# EAGLE board PCB_2D (EAGLE 9.7.0)
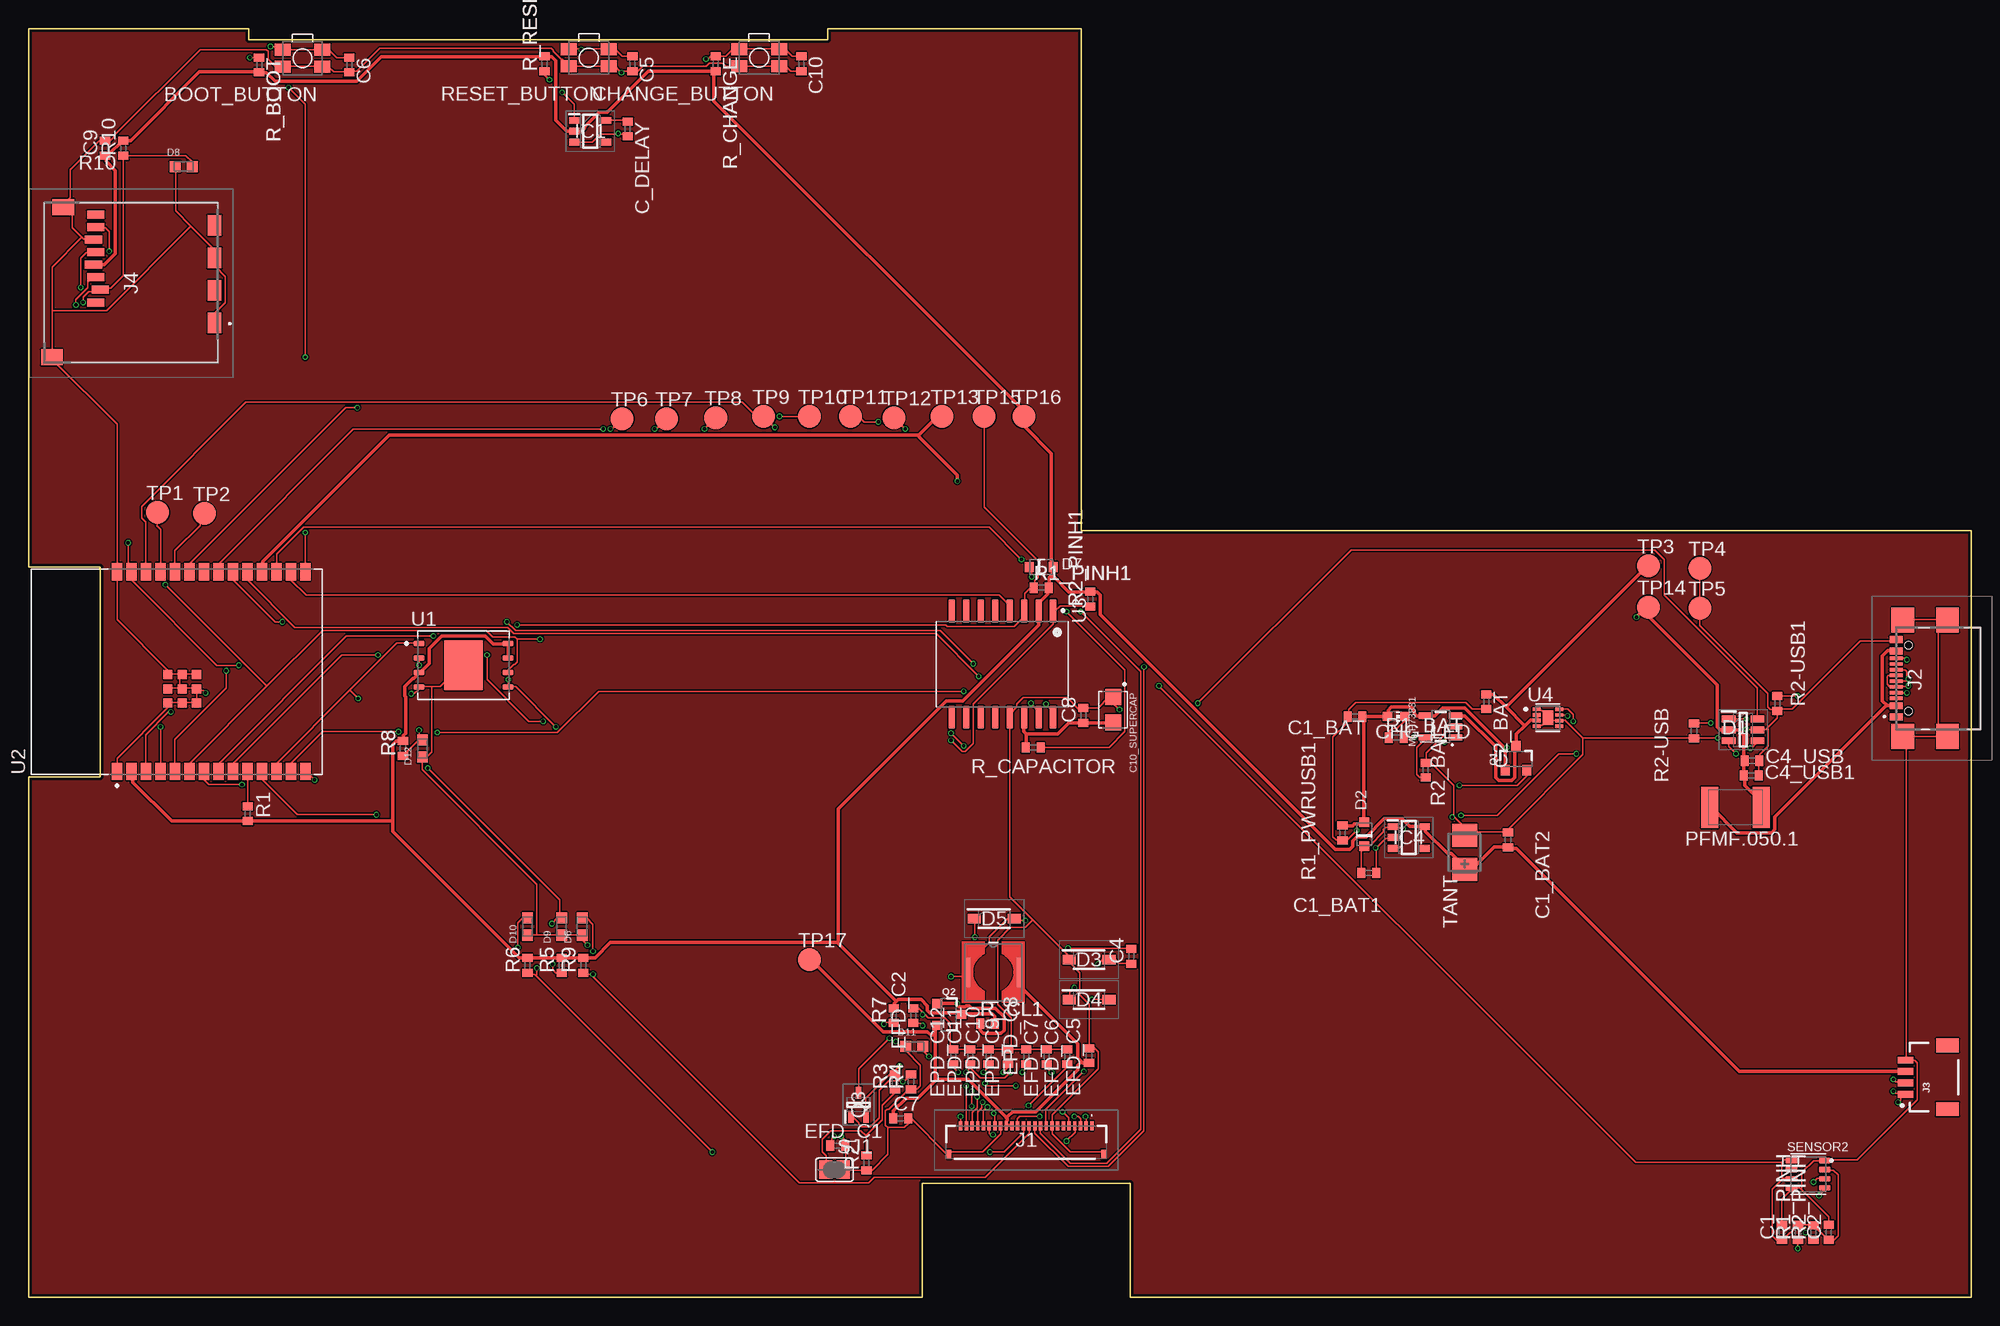
[diagram p0: board, top side]
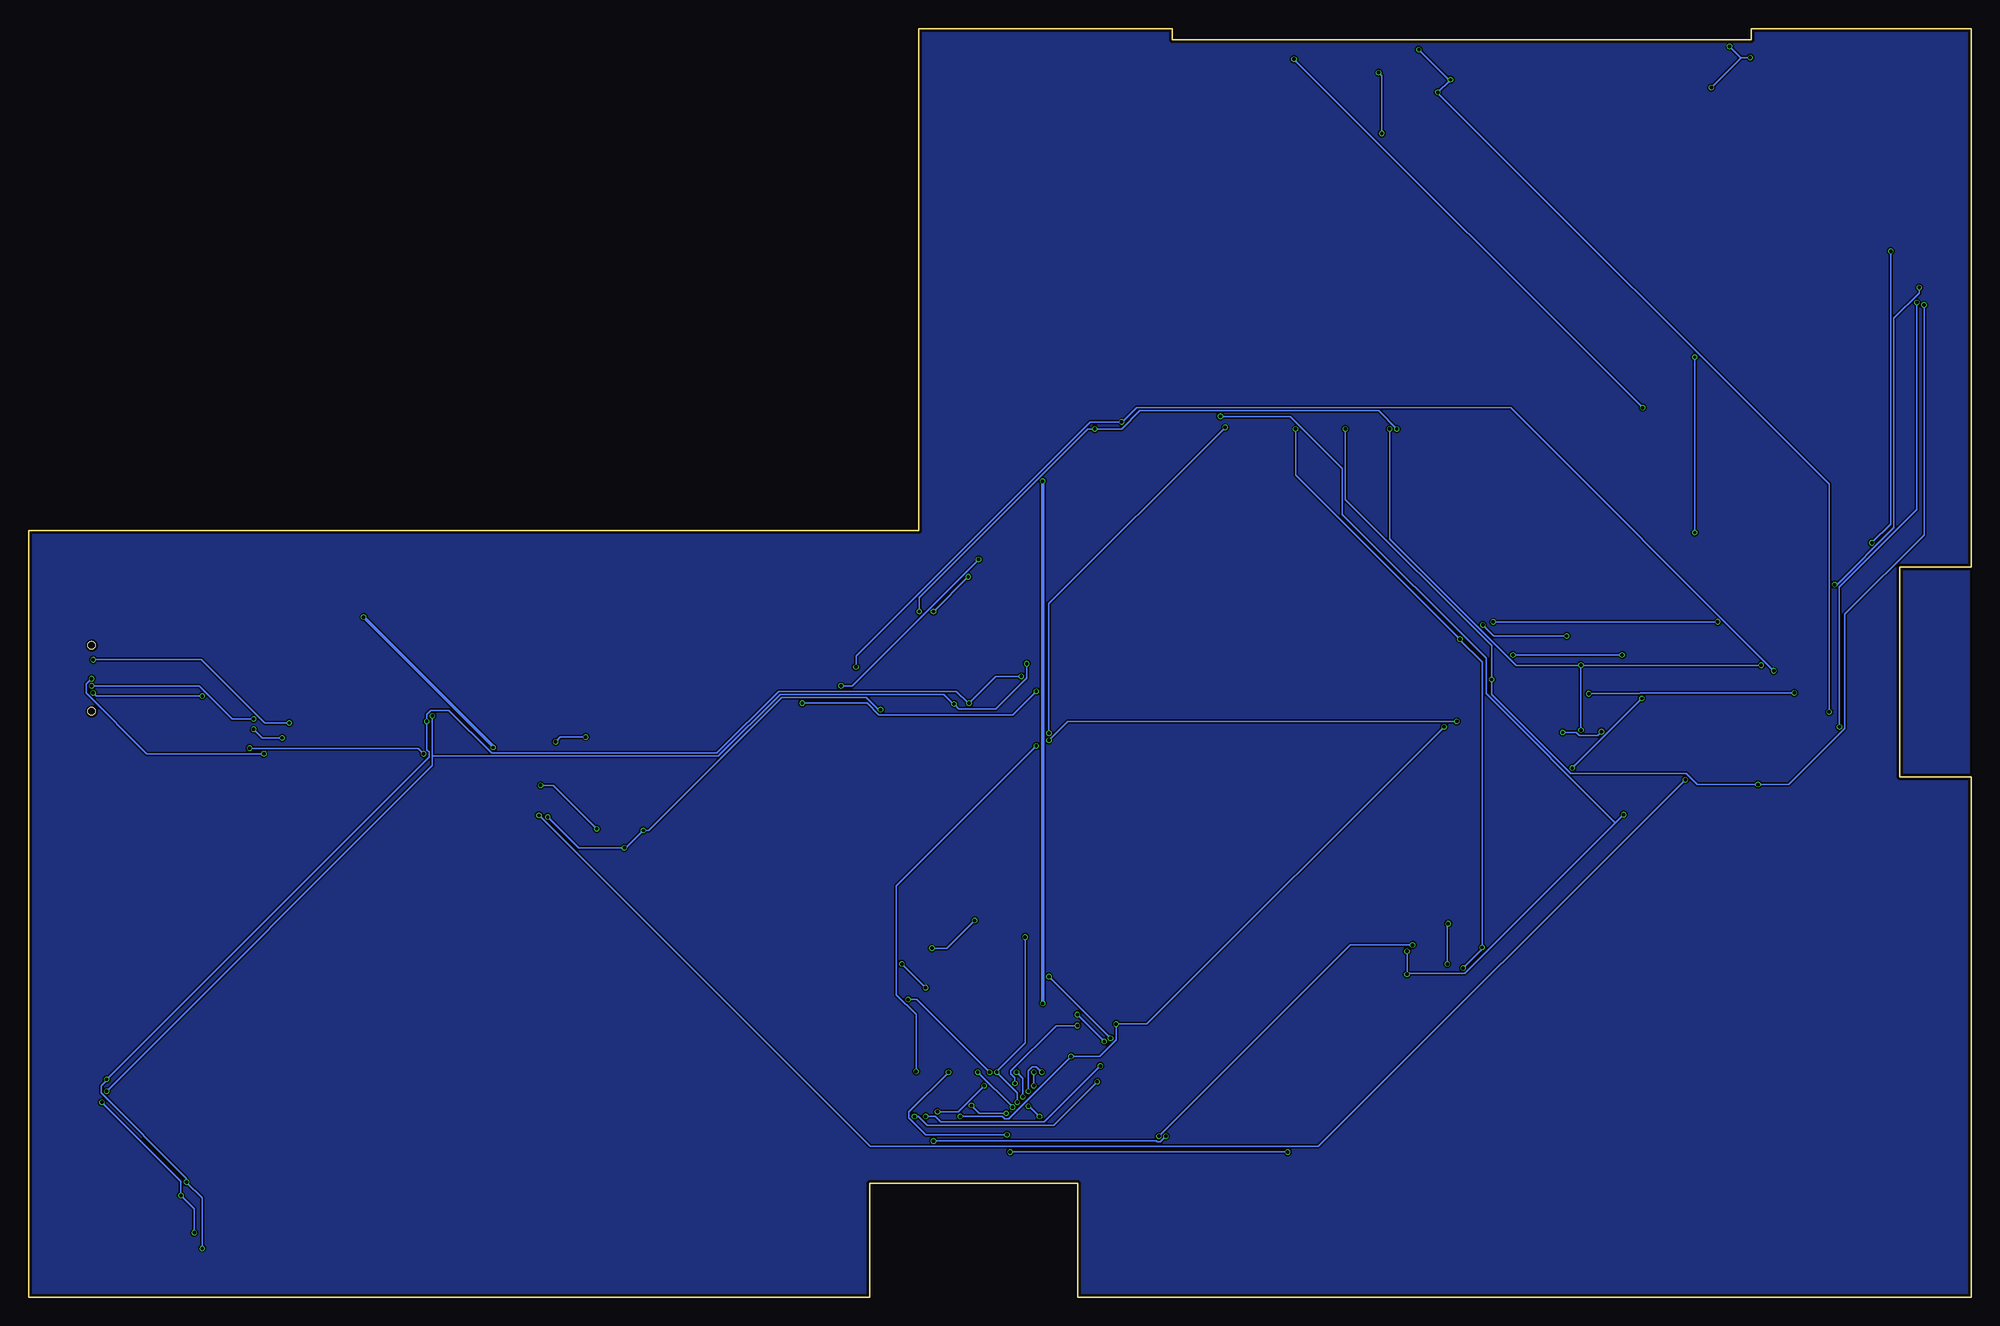
[diagram p1: board, bottom side, seen from below]

Size 170.2 x 111.2 mm. Coordinates in mm from the lower left corner, seen from the top.
Outline: 0,0 78.3,0 78.3,10 96.5,10 96.5,0 170.2,0 170.2,67.2 92.2,67.2 92.2,111.2 70,111.2 70,110.2 19.3,110.2 19.3,111.2 0,111.2 0,64 6.3,64 6.3,45.6 0,45.6 0,0
Copper layers (1*16): Top 0.035mm / dielectric 1.6mm / Bottom 0.035mm
Design rules "jlcpcb-2layers.dru": minimum track width 0.15mm, minimum drill 0.3mm, track to track 5mil, track to pad 5mil, pad to pad 5mil, via to via 5mil, smd to smd 5mil, copper to edge 0.2mm, drill to drill 6mil, minimum pad ring 10mil, minimum via ring 3mil, stop-mask expansion 4mil, vias tented up to drill 0mil, thermal gap 10mil
Net classes: 0 default: width 0.15 mm; 1 POWER: width 0.3 mm

## Footprints (pad centres in the part's own frame; a part is rotated, then mirrored left to right if it is on the bottom)
MYBUTTON = smd 1.4 x 1.05: 1 1.75,0.75; 2 -1.75,0.75; 3 -1.75,-0.75; 4 1.75,-0.75
EAGLE-LTSPICE_C0402 = smd 0.7 x 0.9: 1 -0.65,0; 2 0.65,0
CAPCP3225X100N = smd 1.4 x 1.4: 1 -1.1,0; 2 1.1,0
ADAFRUIT_CHIP-LED0603 = smd 0.8 x 0.8: A 0,-0.75; C 0,0.75
SOT95P280X145-6N = smd 1.2 x 0.6: 1 -1.25,0.95; 2 -1.25,0; 3 -1.25,-0.95; 4 1.25,-0.95; 5 1.25,0; 6 1.25,0.95
ESP32_WROVER_AVX---SD0805S020S1R0_AVX_SD0805S020S1R0_0 = smd 0.8 x 0.9: 1 -1.05,0; 2 1.05,0
SOD3716X135N = smd 1.15 x 0.8: 1 -1.75,0; 2 1.75,0
DIOC1608X36N = smd 0.97 x 0.94: 1 -0.75,0; 2 0.75,0
SOT95P280X125-5N = smd 0.9 x 0.6: 1 -1.4,0.95; 2 -1.4,0; 3 -1.4,-0.95; 4 1.4,-0.95; 5 1.4,0.95
SOT95P280X120-5N = smd 0.9 x 0.6: 1 -1.4,0.95; 2 -1.4,0; 3 -1.4,-0.95; 4 1.4,-0.95; 5 1.4,0.95
FH34SRJ24S05SH99 = smd 0.3 x 0.8: 1 5.75,1.45; 2 5.25,1.45; 3 4.75,1.45; 4 4.25,1.45; 5 3.75,1.45; 6 3.25,1.45; 7 2.75,1.45; 8 2.25,1.45; 9 1.75,1.45; 10 1.25,1.45; 11 0.75,1.45; 12 0.25,1.45; 13 -0.25,1.45; 14 -0.75,1.45; 15 -1.25,1.45; 16 -1.75,1.45; 17 -2.25,1.45; 18 -2.75,1.45; 19 -3.25,1.45; 20 -3.75,1.45; 21 -4.25,1.45; 22 -4.75,1.45; 23 -5.25,1.45; 24 -5.75,1.45 | smd 0.4 x 0.8: MP1 6.75,-1.05; MP2 -6.75,-1.05
SAMACSYS_PARTS_USB4110GFA = smd 0.3 x 1.15: A1 -3.553,3.678; A4 -2.55,3.678; A5 -1.25,3.678; A6 -0.25,3.678; A7 0.25,3.678; A8 1.25,3.678; A9 2.55,3.678; A12 3.553,3.678; B1 3.253,3.678; B4 2.25,3.678; B5 1.75,3.678; B6 0.75,3.678; B7 -0.75,3.678; B8 -1.75,3.678; B9 -2.25,3.678; B12 -3.253,3.678 | smd 2.18 x 2: MP1 -5.11,-0.827; MP2 5.11,-0.827; MP3 -5.11,3.103; MP4 5.11,3.103 | hole 0.65: -2.89,2.603; 2.89,2.603
JST04_1MM_RA = smd 0.6 x 1.35: 1 -1.5,0; 2 -0.5,0; 3 0.5,0; 4 1.5,0 | smd 1.2 x 2: NC1 2.8,-3.675; NC2 -2.8,-3.675
112ATAARR03ATTEND = smd 1.8 x 1.2: G1 10.6,10.4; G2 4.9,10.4; S1 7.75,10.4; S2 2.05,10.4 | smd 1.4 x 1.9: G3 13.6,-3.85; G4 0.45,-2.85 | smd 0.7 x 1.5: P1 8.8,0; P2 7.7,0.4; P3 6.6,0; P4 5.5,-0.2; P5 4.4,0; P6 3.3,-0.2; P7 2.2,0; P8 1.1,0
IND_4828-WE-TPC_WRE = smd 0.508 x 2.54: 1 -2.286,0; 2 2.286,0
ESP32_WROVER_SPARKFUN-IC-POWER_SOT23-5 = smd 0.55 x 1.2: 1 -0.95,-1.3; 2 0,-1.3; 3 0.95,-1.3; 4 0.95,1.3; 5 -0.95,1.3
ESP32C6_VARISTOR_CT/CN1812 = smd 1.5 x 3.6: 1 -2.25,0; 2 2.25,0
ESP32_WROVER_SPARKFUN-DISCRETESEMI_SOT23-3 = smd 0.8 x 0.9: 1 -0.95,-1; 2 0.95,-1; 3 0,1.1
SOT65P210X110-3N = smd 1.05 x 0.5: 1 -1.05,0.65; 2 -1.05,-0.65; 3 1.05,0
ESP32_WROVER_EAGLE-LTSPICE_R0402 = smd 0.7 x 0.9: 1 -0.65,0; 2 0.65,0
ESP32_WROVER_BME680_PSON80P300X300X100-8N = smd 1.016 x 0.5: 1 1.458,1.2; 2 1.458,0.4; 3 1.458,-0.4; 4 1.458,-1.2; 5 -1.458,-1.22; 6 -1.458,-0.4; 7 -1.458,0.4; 8 -1.458,1.2
SJ = smd 1.168 x 1.6: 1 -0.762,0; 2 0.762,0
RCL_CT3528 = smd 2 x 2.2: + -1.5,0; - 1.5,0
TP20R = smd 2 x 2: TP 0,0
SON127P600X800X80-9N = smd 0.94 x 0.44: 1 -3.895,1.905; 2 -3.895,0.635; 3 -3.895,-0.635; 4 -3.895,-1.905; 5 3.895,-1.905; 6 3.895,-0.635; 7 3.895,0.635; 8 3.895,1.905 | smd 3.4 x 4.3: 9 0,0
XCVR_ESP32-C6-WROOM-1-N8 = smd 1.5 x 0.9: 1 -8.75,5.26; 2 -8.75,3.99; 3 -8.75,2.72; 4 -8.75,1.45; 5 -8.75,0.18; 6 -8.75,-1.09; 7 -8.75,-2.36; 8 -8.75,-3.63; 9 -8.75,-4.9; 10 -8.75,-6.17; 11 -8.75,-7.44; 12 -8.75,-8.71; 13 -8.75,-9.98; 14 -8.75,-11.25; 15 8.75,-11.25; 16 8.75,-9.98; 17 8.75,-8.71; 18 8.75,-7.44; 19 8.75,-6.17; 20 8.75,-4.9; 21 8.75,-3.63; 22 8.75,-2.36; 23 8.75,-1.09; 24 8.75,0.18; 25 8.75,1.45; 26 8.75,2.72; 27 8.75,3.99; 28 8.75,5.26 | smd 0.8 x 0.8: 29_1 -2.755,0.79; 29_2 -1.505,0.79; 29_3 -0.255,0.79; 29_4 -2.755,-0.46; 29_5 -1.505,-0.46; 29_6 -0.255,-0.46; 29_7 -2.755,-1.71; 29_8 -1.505,-1.71; 29_9 -0.255,-1.71
SOIC127P1032X265-16N = smd 2.05 x 0.59: 1 -4.655,4.445; 2 -4.655,3.175; 3 -4.655,1.905; 4 -4.655,0.635; 5 -4.655,-0.635; 6 -4.655,-1.905; 7 -4.655,-3.175; 8 -4.655,-4.445; 9 4.655,-4.445; 10 4.655,-3.175; 11 4.655,-1.905; 12 4.655,-0.635; 13 4.655,0.635; 14 4.655,1.905; 15 4.655,3.175; 16 4.655,4.445
SON50P200X200X80-9N = smd 0.76 x 0.27: 1 -0.985,0.75; 4 -0.985,-0.75; 5 0.985,-0.75; 6 0.985,-0.25; 7 0.985,0.25; 8 0.985,0.75 | smd 0.76 x 0.372: 2 -0.985,0.25; 3 -0.985,-0.25 | smd 0.9 x 1.3: 9 0,0

## Placement (x,y rotation side)
BOOT_BUTTON  BUTTON_CUSYOMV1  [MYBUTTON]  24,108.6 180 top
C1  100nF  [EAGLE-LTSPICE_C0402]  153.6,5.7 90 top
C1_BAT  4.7uF  [EAGLE-LTSPICE_C0402]  116.2,50.9 180 top
C1_BAT1  4.7uF  [EAGLE-LTSPICE_C0402]  117.4,37.2 0 top
C1_BAT2  4.7uF  [EAGLE-LTSPICE_C0402]  129.6,40.1 90 top
C2  100nF  [EAGLE-LTSPICE_C0402]  157.7,5.7 90 top
C2_BAT  4.7uF  [EAGLE-LTSPICE_C0402]  127.7,52.2 270 top
C4  4.7uF/25V  [EAGLE-LTSPICE_C0402]  96.6,29.9 90 top
C4_USB  4.7uF  [EAGLE-LTSPICE_C0402]  150.98,47.04 0 top
C4_USB1  100nF  [EAGLE-LTSPICE_C0402]  150.91,45.75 0 top
C5  1uF  [EAGLE-LTSPICE_C0402]  52.9,108.11 270 top
C6  100nF  [EAGLE-LTSPICE_C0402]  28.1,108.01 270 top
C7  10uF  [EAGLE-LTSPICE_C0402]  76.4,15.7 0 top
C8  100nF  [EAGLE-LTSPICE_C0402]  92.4,51 90 top
C9  100nF  [EAGLE-LTSPICE_C0402]  6.7,100.72 90 top
C10  100nF  [EAGLE-LTSPICE_C0402]  67.7,108.11 270 top
C10_SUPERCAP  CPH3225A  [CAPCP3225X100N]  95,51.5 270 top
C_DELAY  100nF  [EAGLE-LTSPICE_C0402]  52.5,102.4 270 top
CHANGE_BUTTON  BUTTON_CUSYOMV1  [MYBUTTON]  64,108.65 180 top
CHG_LED  [ADAFRUIT_CHIP-LED0603]  119.8,50.9 270 top
D1  USBLC6-2SC6Y  [SOT95P280X145-6N]  150.19,49.74 0 top
D2  ESP32_WROVER_AVX---SD0805S020S1R0_AVX_SD0805S020S1R0_0_0AVX_SD0805S020S1R0_0_0  [ESP32_WROVER_AVX---SD0805S020S1R0_AVX_SD0805S020S1R0_0]  117,40.6 90 top
D3  MBR0530  [SOD3716X135N]  92.9,29.6 0 top
D4  MBR0530  [SOD3716X135N]  92.9,26.1 0 top
D5  MBR0530  [SOD3716X135N]  84.6,33.2 0 top
D6  PGB1010603MR  [DIOC1608X36N]  48.5,32.5 90 top
D7  ESP32_WROVER_AVX---SD0805S020S1R0_AVX_SD0805S020S1R0_0_0AVX_SD0805S020S1R0_0_0  [ESP32_WROVER_AVX---SD0805S020S1R0_AVX_SD0805S020S1R0_0]  88.7,64 0 top
D8  PGB1010603MR  [DIOC1608X36N]  13.6,99.1 0 top
D9  PGB1010603MR  [DIOC1608X36N]  46.7,32.5 90 top
D10  PGB1010603MR  [DIOC1608X36N]  43.7,32.5 90 top
D11  PGB1010603MR  [DIOC1608X36N]  77.6,22 0 top
D12  PGB1010603MR  [DIOC1608X36N]  34.5,48.1 90 top
EFD_C1  1uF/50V  [EAGLE-LTSPICE_C0402]  70.9,13.3 0 top
EFD_C2  1uF/50V  [EAGLE-LTSPICE_C0402]  77.5,24.7 90 top
EFD_C5  1uF/50V  [EAGLE-LTSPICE_C0402]  92.9,21.2 90 top
EFD_C6  1uF/50V  [EAGLE-LTSPICE_C0402]  91,21.1 90 top
EFD_C7  1uF/50V  [EAGLE-LTSPICE_C0402]  89.2,21.1 90 top
EPD_C8  1uF/50V  [EAGLE-LTSPICE_C0402]  87.4,21.1 90 top
EPD_C9  1uF/50V  [EAGLE-LTSPICE_C0402]  85.8,21.1 90 top
EPD_C10  1uF/50V  [EAGLE-LTSPICE_C0402]  84.1,21.1 90 top
EPD_C11  1uF/50V  [EAGLE-LTSPICE_C0402]  82.5,21.1 90 top
EPD_C12  1uF/50V  [EAGLE-LTSPICE_C0402]  81,21.1 90 top
IC1  BD5229G-TR  [SOT95P280X125-5N]  49.2,102.2 0 top
IC4  XC6220A331MR-G  [SOT95P280X120-5N]  120.9,40.3 0 top
J1  FH34SRJ-24S-0.5SH_99_  [FH34SRJ24S05SH99]  87.4,13.6 0 top
J2  SAMACSYS_PARTS_USB4110-GF-A  [SAMACSYS_PARTS_USB4110GFA]  167.28,54.26 90 top
J3  QWIIC_RIGHT_ANGLE  [JST04_1MM_RA]  164.43,19.3 90 top
J4  112A-TAAR-R03_ATTEND  [112ATAARR03ATTEND]  5.89,96 270 top
L1  744043680IND_4828-WE-TPC_WRE  [IND_4828-WE-TPC_WRE]  84.51,28.5 0 top
MCP73831  ESP32_WROVER_SPARKFUN-IC-POWER_MCP73831  [ESP32_WROVER_SPARKFUN-IC-POWER_SOT23-5]  123.7,50.03 90 top
PFMF.050.1  ESP32C6_VARISTORCN1812  [ESP32C6_VARISTOR_CT/CN1812]  149.52,42.96 0 top
Q1  20V/4.2A/52mΩ/1.4W  [ESP32_WROVER_SPARKFUN-DISCRETESEMI_SOT23-3]  130.3,47.2 0 top
Q2  20V/4.2A/52mΩ/1.4W  [ESP32_WROVER_SPARKFUN-DISCRETESEMI_SOT23-3]  80.6,24.8 270 top
Q3  SI1308EDL-T1-GE3  [SOT65P210X110-3N]  72.7,16.9 90 top
R1  10K  [ESP32_WROVER_EAGLE-LTSPICE_R0402]  19.2,42.4 270 top
R1_BAT  200  [ESP32_WROVER_EAGLE-LTSPICE_R0402]  119.82,49.06 0 top
R1_PINH  10K  [ESP32_WROVER_EAGLE-LTSPICE_R0402]  155,5.7 90 top
R1_PINH1  10K  [ESP32_WROVER_EAGLE-LTSPICE_R0402]  88.7,62.2 0 top
R1_PWRUSB1  100K  [ESP32_WROVER_EAGLE-LTSPICE_R0402]  115.1,40.7 90 top
R2  2.2  [ESP32_WROVER_EAGLE-LTSPICE_R0402]  73.4,11.8 90 top
R2-USB  5k1  [ESP32_WROVER_EAGLE-LTSPICE_R0402]  145.89,49.64 270 top
R2-USB1  10K  [ESP32_WROVER_EAGLE-LTSPICE_R0402]  153.18,52.05 90 top
R2_BAT  2K  [ESP32_WROVER_EAGLE-LTSPICE_R0402]  122.4,46.2 270 top
R2_PINH  10K  [ESP32_WROVER_EAGLE-LTSPICE_R0402]  156.35,5.69 90 top
R2_PINH1  10K  [ESP32_WROVER_EAGLE-LTSPICE_R0402]  93,61.2 90 top
R3  0.47  [ESP32_WROVER_EAGLE-LTSPICE_R0402]  75.9,18.9 90 top
R4  10K  [ESP32_WROVER_EAGLE-LTSPICE_R0402]  77.3,18.9 90 top
R5  10K  [ESP32_WROVER_EAGLE-LTSPICE_R0402]  46.7,29.1 90 top
R6  10K  [ESP32_WROVER_EAGLE-LTSPICE_R0402]  43.7,29.1 90 top
R7  10K  [ESP32_WROVER_EAGLE-LTSPICE_R0402]  75.8,24.7 90 top
R8  10K  [ESP32_WROVER_EAGLE-LTSPICE_R0402]  32.8,48.1 90 top
R9  10K  [ESP32_WROVER_EAGLE-LTSPICE_R0402]  48.6,29.1 90 top
R10  10K  [ESP32_WROVER_EAGLE-LTSPICE_R0402]  8.3,100.7 90 top
R_BOOT  10K  [ESP32_WROVER_EAGLE-LTSPICE_R0402]  20.2,108.01 270 top
R_CAPACITOR  15  [ESP32_WROVER_EAGLE-LTSPICE_R0402]  88,48.2 180 top
R_CHANGE  10K  [ESP32_WROVER_EAGLE-LTSPICE_R0402]  60.2,108.11 270 top
R_CL1  10K  [ESP32_WROVER_EAGLE-LTSPICE_R0402]  84,24 0 top
R_RESET  10K  [ESP32_WROVER_EAGLE-LTSPICE_R0402]  45.2,108.11 90 top
RESET_BUTTON  BUTTON_CUSYOMV1  [MYBUTTON]  49.08,108.65 180 top
SENSOR2  ESP32_WROVER_BME680_BME680  [ESP32_WROVER_BME680_PSON80P300X300X100-8N]  155.9,10.8 0 top
SJ1  [SJ]  70.6,11.2 180 top
TANT  100uF  [RCL_CT3528]  125.8,39 90 top
TP1  TPTP20R  [TP20R]  11.3,68.8 0 top
TP2  TPTP20R  [TP20R]  15.4,68.7 0 top
TP3  TPTP20R  [TP20R]  141.9,64.1 0 top
TP4  TPTP20R  [TP20R]  146.4,63.9 0 top
TP5  TPTP20R  [TP20R]  146.4,60.4 0 top
TP6  TPTP20R  [TP20R]  52,77 0 top
TP7  TPTP20R  [TP20R]  55.9,77 0 top
TP8  TPTP20R  [TP20R]  60.2,77.1 0 top
TP9  TPTP20R  [TP20R]  64.4,77.2 0 top
TP10  TPTP20R  [TP20R]  68.4,77.2 0 top
TP11  TPTP20R  [TP20R]  72,77.2 0 top
TP12  TPTP20R  [TP20R]  75.8,77.1 0 top
TP13  TPTP20R  [TP20R]  80,77.2 0 top
TP14  TPTP20R  [TP20R]  141.9,60.5 0 top
TP15  TPTP20R  [TP20R]  83.7,77.2 0 top
TP16  TPTP20R  [TP20R]  87.2,77.2 0 top
TP17  TPTP20R  [TP20R]  68.4,29.6 0 top
U1  W25Q512JVEIQ  [SON127P600X800X80-9N]  38.1,55.4 0 top
U2  ESP32-C6-WROOM-1-N8  [XCVR_ESP32-C6-WROOM-1-N8]  13,54.84 90 top
U3  DS3231SN#  [SOIC127P1032X265-16N]  85.3,55.5 270 top
U4  MAX17048G+T10  [SON50P200X200X80-9N]  133.1,50.8 0 top

## Library data of the parts
BOOT_BUTTON CHANGE_BUTTON CHG_LED PFMF.050.1 RESET_BUTTON SJ1 TP1-TP17 = DeskAssistant v19 v1
C1 C1_BAT C1_BAT1 C1_BAT2 C2 C2_BAT C4 C4_USB C4_USB1 C5-C10 C_DELAY EFD_C1 EFD_C2 EFD_C5-EFD_C7 EPD_C8-EPD_C12 = DeskAssistant v19 v1; SPICEMODEL: NONE; SPICEPREFIX: C
C10_SUPERCAP = DeskAssistant v19 v1; AVAILABILITY: Not in stock; CHECK_PRICES: https://www.snapeda.com/parts/CPH3225A/Seiko+Instruments/view-part/?ref=eda; DESCRIPTION: 11 mF (EDLC) Supercapacitor 3.3 V 1210 (3225 Metric) - -; MF: Seiko Instruments; MP: CPH3225A; PACKAGE: 1210 Seiko; PRICE: None; PURCHASE-URL: https://www.snapeda.com/api/url_track_click_mouser/?unipart_id=562593&manufacturer=Seiko Instruments&part_name=CPH3225A&search_term=None; SNAPEDA_LINK: https://www.snapeda.com/parts/CPH3225A/Seiko+Instruments/view-part/?ref=snap
D1 = DeskAssistant v19 v1; AVAILABILITY: In Stock; CHECK_PRICES: https://www.snapeda.com/parts/USBLC6-2SC6Y/STMicroelectronics/view-part/?ref=eda; DESCRIPTION: 17V Clamp 5A (8/20µs) Ipp Tvs Diode Surface Mount SOT-23-6; MF: STMicroelectronics; MP: USBLC6-2SC6Y; PACKAGE: SOT-23-6 STMicroelectronics; PRICE: None; SNAPEDA_LINK: https://www.snapeda.com/parts/USBLC6-2SC6Y/STMicroelectronics/view-part/?ref=snap
D2 D7 = DeskAssistant v19 v1; CENTROID_NOT_SPECIFIED: No; DATASHEET: http://datasheets.avx.com/schottky.pdf; DIGIKEY_DESCRIPTION: DIODE SCHOTTKY 20V 1A 0805; DIGIKEY_PART_NUMBER: 478-7800-1-ND; LEAD_FREE: yes; MF: AVX; MOUSER_PART_NUMBER: 581-SD0805S020S1R0; PACKAGE: 0805 (2012 metric); PREFIX: D; ROHS: yes; TEMPERATURE_RANGE_HIGH: +125°C; TEMPERATURE_RANGE_LOW: -55°C
D3-D5 = DeskAssistant v19 v1; AVAILABILITY: In Stock; CHECK_PRICES: https://www.snapeda.com/parts/MBR0530/Onsemi/view-part/?ref=eda; DESCRIPTION: Diode Schottky 30 V 500mA Surface Mount SOD-123; MF: ON Semiconductor; MP: MBR0530; PACKAGE: SOD-123-2 ON Semiconductor; PRICE: None; PURCHASE-URL: https://www.snapeda.com/api/url_track_click_mouser/?unipart_id=179458&manufacturer=ON Semiconductor&part_name=MBR0530&search_term=None; SNAPEDA_LINK: https://www.snapeda.com/parts/MBR0530/Onsemi/view-part/?ref=snap
D6 D8-D12 = DeskAssistant v19 v1; AVAILABILITY: In Stock; CHECK_PRICES: https://www.snapeda.com/parts/PGB1010603MR/Littelfuse/view-part/?ref=eda; DESCRIPTION: 150V (Typ) Clamp - Ipp Tvs Diode Surface Mount 0603 (1608 Metric); MF: Littelfuse Inc.; MP: PGB1010603MR; PACKAGE: 0603 Littelfuse Inc.; PRICE: None; PURCHASE-URL: https://www.snapeda.com/api/url_track_click_mouser/?unipart_id=5659453&manufacturer=Littelfuse Inc.&part_name=PGB1010603MR&search_term=None; SNAPEDA_LINK: https://www.snapeda.com/parts/PGB1010603MR/Littelfuse/view-part/?ref=snap
IC1 = DeskAssistant v19 v1; DESCRIPTION: Voltage Detector with Adjustable Delay Time: CMOS processes are utilized to develop high precision, low current consumption CMOS reset ICs that allow arbitrary setting of the delay time. The extensive lineup includes both Nch Open Drain and CMOS output types in a wide range of detection voltages (from 2.3V to 6.0V, in 0.1V steps), enabling selection of the ideal solution based on customer requirements. In addition, the entire series is of course both lead-free and RoHS-compliant.; HEIGHT: 1.25mm; MANUFACTURER_NAME: ROHM Semiconductor; MANUFACTURER_PART_NUMBER: BD5229G-TR; MOUSER_PART_NUMBER: 755-BD5229G-TR; MOUSER_PRICE-STOCK: https://www.mouser.co.uk/ProductDetail/ROHM-Semiconductor/BD5229G-TR?qs=4kLU8WoGk0vvnhrrYwdszw%3D%3D
IC4 = DeskAssistant v19 v1; DESCRIPTION: LDO Voltage Regulators; HEIGHT: 1.2mm; MANUFACTURER_NAME: Torex; MANUFACTURER_PART_NUMBER: XC6220A331MR-G; MOUSER_PART_NUMBER: 865-XC6220A331MR-G; MOUSER_PRICE-STOCK: https://www.mouser.co.uk/ProductDetail/Torex-Semiconductor/XC6220A331MR-G?qs=AsjdqWjXhJ8ZSWznL1J0gg%3D%3D
J1 = DeskAssistant v19 v1; DESCRIPTION: 24 Position FFC, FPC Connector Contacts, Top and Bottom 0.020" (0.50mm) Surface Mount, Right Angle; HEIGHT: 1.1mm; MANUFACTURER_NAME: Hirose; MANUFACTURER_PART_NUMBER: FH34SRJ-24S-0.5SH(99); MOUSER_PART_NUMBER: 798-FH34SRJ24S05SH99; MOUSER_PRICE-STOCK: https://www.mouser.co.uk/ProductDetail/Hirose-Connector/FH34SRJ-24S-0.5SH99?qs=vcbW%252B4%252BSTIpKBl5ap9J8Fw%3D%3D
J2 = DeskAssistant v19 v1; DESCRIPTION: CONN USB 2.0 TYPE-C R/A SMT; HEIGHT: 3.26mm; MANUFACTURER_NAME: GCT (GLOBAL CONNECTOR TECHNOLOGY); MANUFACTURER_PART_NUMBER: USB4110-GF-A; MOUSER_PART_NUMBER: 640-USB4110-GF-A; MOUSER_PRICE-STOCK: https://www.mouser.co.uk/ProductDetail/GCT/USB4110-GF-A?qs=KUoIvG%2F9IlYiZvIXQjyJeA%3D%3D
J3 = DeskAssistant v19 v1; PROD_ID: CONN-13694
J4 = DeskAssistant v19 v1; DESCRIPTION: Micro SD Card Socket, Push-Push Type, Top Mount, SMT, H=1.83mm, 10u; HEIGHT: 1.9mm; MANUFACTURER_NAME: ATTEND; MANUFACTURER_PART_NUMBER: 112A-TAAR-R03 ATTEND
L1 = DeskAssistant v19 v1; COPYRIGHT: Copyright (C) 2024 Ultra Librarian. All rights reserved.; MANUFACTURER_PART_NUMBER: 744043680; MFR_NAME: Wurth Electronics
MCP73831 = DeskAssistant v19 v1; PROD_ID: IC-09995
Q1 Q2 = DeskAssistant v19 v1; PROD_ID: TRAN-14388
Q3 = DeskAssistant v19 v1; AVAILABILITY: In Stock; CHECK_PRICES: https://www.snapeda.com/parts/SI1308EDL-T1-GE3/Vishay+Siliconix/view-part/?ref=eda; DESCRIPTION: Si1308EDL-T1-GE3 N-channel MOSFET Transistor, 1.5 A, 30 V, 3-Pin SC-70 | Siliconix / Vishay SI1308EDL-T1-GE3; MF: Vishay Siliconix; MP: SI1308EDL-T1-GE3; PACKAGE: SOT-323 Vishay Semiconductor; PRICE: None; PURCHASE-URL: https://www.snapeda.com/api/url_track_click_mouser/?unipart_id=274603&manufacturer=Vishay Siliconix&part_name=SI1308EDL-T1-GE3&search_term=None; SNAPEDA_LINK: https://www.snapeda.com/parts/SI1308EDL-T1-GE3/Vishay+Siliconix/view-part/?ref=snap
R1 R1_BAT R1_PINH R1_PINH1 R1_PWRUSB1 R2 R2-USB R2-USB1 R2_BAT R2_PINH R2_PINH1 R3-R10 R_BOOT R_CAPACITOR R_CHANGE R_CL1 R_RESET = DeskAssistant v19 v1; SPICEMODEL: NONE; SPICEPREFIX: R
SENSOR2 = DeskAssistant v19 v1; AVAILABILITY: Unavailable; DESCRIPTION: Integrated Environmental Unit; MF: Bosch Sensortec; MP: BME680; PACKAGE: LGA-8 Bosch Tools; PRICE: None
TANT = DeskAssistant v19 v1; SPICEPREFIX: C
U1 = DeskAssistant v19 v1; AVAILABILITY: In Stock; CHECK_PRICES: https://www.snapeda.com/parts/W25Q512JVEIQ/Winbond+Electronics/view-part/?ref=eda; DESCRIPTION: FLASH - NOR Memory IC 512Mb (64M x 8) SPI - Quad I/O 133 MHz 8-WSON (8x6); MF: Winbond Electronics; MP: W25Q512JVEIQ; PACKAGE: Package; PRICE: None; SNAPEDA_LINK: https://www.snapeda.com/parts/W25Q512JVEIQ/Winbond+Electronics/view-part/?ref=snap
U2 = DeskAssistant v19 v1; AVAILABILITY: In Stock; CHECK_PRICES: https://www.snapeda.com/parts/ESP32-C6-WROOM-1-N8/Espressif+Systems/view-part/?ref=eda; DESCRIPTION: Multiprotocol Modules ESP32-C6 module, Wi-Fi 6 in 2.4 GHz band, Bluetooth 5, Zigbee 3.0 and Thread. ESP34-WROOM Compatible - ENGINEERING SAMPLE; MF: Espressif Systems; MP: ESP32-C6-WROOM-1-N8; PACKAGE: None; PRICE: None; SNAPEDA_LINK: https://www.snapeda.com/parts/ESP32-C6-WROOM-1-N8/Espressif+Systems/view-part/?ref=snap
U3 = DeskAssistant v19 v1; AVAILABILITY: In Stock; CHECK_PRICES: https://www.snapeda.com/parts/DS3231SN%23/Analog+Devices/view-part/?ref=eda; DESCRIPTION: Extremely Accurate I²C-Integrated RTC/TCXO/Crystal; MF: Analog Devices; MP: DS3231SN#; PACKAGE: SOIC-16 Maxim; PRICE: None; PURCHASE-URL: https://www.snapeda.com/api/url_track_click_mouser/?unipart_id=99048&manufacturer=Analog Devices&part_name=DS3231SN#&search_term=None; SNAPEDA_LINK: https://www.snapeda.com/parts/DS3231SN%23/Analog+Devices/view-part/?ref=snap
U4 = DeskAssistant v19 v1; AVAILABILITY: In Stock; CHECK_PRICES: https://www.snapeda.com/parts/MAX17048G+T10/Analog+Devices/view-part/?ref=eda; DESCRIPTION: 3µA 1-Cell/2-Cell Fuel Gauge with ModelGauge; MF: Analog Devices; MP: MAX17048G+T10; PACKAGE: TDFN-8 Maxim; PRICE: None; PURCHASE-URL: https://www.snapeda.com/api/url_track_click_mouser/?unipart_id=329239&manufacturer=Analog Devices&part_name=MAX17048G+T10&search_term=None; SNAPEDA_LINK: https://www.snapeda.com/parts/MAX17048G+T10/Analog+Devices/view-part/?ref=snap

## Nets
3V3 [POWER]: C1_BAT2.1 C9.1 D7.2 IC1.2 IC4.5 J3.3 J4.P4 Q2.3 R1.2 R1_PINH1.2 R2_PINH1.2 R5.2 R6.2 R7.2 R8.2 R9.2 R10.2 R_BOOT.2 R_CHANGE.2 R_CL1.2 R_RESET.2 TANT.+ TP16.TP U1.3 U1.7 U1.8 U2.2 U3.2
32KHZ: R2_PINH1.1 U2.9 U3.1
DN: D1.1 J2.A7 J2.B7
DP: D1.3 J2.A6 J2.B6
EPD_3V3 [POWER]: C7.1 EFD_C5.1 J1.15 J1.16 L1.2 Q2.2 TP17.TP
EPD_3V3_C [POWER]: Q2.1 R_CL1.1 TP13.TP U2.18
EPD_BUSY: J1.9 TP9.TP U2.26
EPD_CS: D6.2 J1.12 R9.1 TP10.TP U2.11
EPD_DC: J1.11 TP11.TP U2.5
EPD_RST: J1.10 TP12.TP U2.21
FLASH_CS: D9.2 R5.1 U1.1 U2.12
GDR: J1.2 Q3.1 R4.2
GND: BOOT_BUTTON.1 BOOT_BUTTON.2 C1.2 C1_BAT1.2 C1_BAT2.2 C1_BAT.2 C2.2 C2_BAT.2 C4_USB1.2 C4_USB.2 C5.2 C6.2 C7.2 C8.2 C9.2 C10.2 C10_SUPERCAP.1 C_DELAY.2 CHANGE_BUTTON.1 CHANGE_BUTTON.2 D1.5 D3.1 D6.1 D8.1 D9.1 D10.1 D11.1 D12.1 EFD_C1.2 EFD_C2.2 EFD_C5.2 EFD_C6.2 EFD_C7.2 EPD_C8.2 EPD_C9.2 EPD_C10.2 EPD_C11.2 EPD_C12.2 IC1.3 IC4.2 J1.8 J1.17 J1.MP1 J1.MP2 J2.A1 J2.A12 J2.B1 J2.B12 J2.MP1 J2.MP2 J2.MP3 J2.MP4 J3.4 J4.G1 J4.G2 J4.G3 J4.G4 J4.P6 MCP73831.2 R1_PWRUSB1.1 R2-USB1.1 R2-USB.2 R2.1 R2_BAT.1 R4.1 RESET_BUTTON.1 RESET_BUTTON.2 SENSOR2.1 SENSOR2.5 SENSOR2.7 SJ1.1 TANT.- TP4.TP TP5.TP U1.4 U1.9 U2.1 U2.28 U2.29_1 U2.29_2 U2.29_3 U2.29_4 U2.29_5 U2.29_6 U2.29_7 U2.29_8 U2.29_9 U3.13 U4.1 U4.4 U4.6 U4.9
GPIO8: R1.1 U2.10
I2C_PW: C1.1 C2.1 R1_PINH.2 R2_PINH.2 SENSOR2.2 SENSOR2.6 SENSOR2.8 U2.17
INT_RTC: R1_PINH1.1 TP15.TP U2.8 U3.3
IO/BOOT: BOOT_BUTTON.3 BOOT_BUTTON.4 C6.1 R_BOOT.1 U2.15
IO/CHANGE: C10.1 CHANGE_BUTTON.3 CHANGE_BUTTON.4 R_CHANGE.1 U2.23
MISO: D12.2 J4.P7 R8.1 TP6.TP U1.2 U2.27
MOSI: D11.2 J1.14 J4.P3 R7.1 TP7.TP U1.5 U2.7
N$1: J2.B5 R2-USB.1
N$2: C1_BAT1.1 D2.1 IC4.1 IC4.3 Q1.2
N$3: MCP73831.1 R1_BAT.2
N$4: CHG_LED.C R1_BAT.1
N$5: MCP73831.5 R2_BAT.2
N$6: C_DELAY.1 IC1.5
N$10: C4.1 D3.2 D4.1
N$11: J2.A5 R2-USB1.2
N$13: D7.1 R_CAPACITOR.1
N$14: EFD_C2.1 J1.5
N$15: EFD_C1.1 J1.4
N$17: EPD_C12.1 J1.24
N$19: EPD_C10.1 J1.22
N$21: EPD_C8.1 J1.20
N$22: EFD_C7.1 J1.19
N$23: EFD_C6.1 J1.18
PREVGH: D5.1 EPD_C9.1 J1.21
PREVGL: D4.2 EPD_C11.1 J1.23
RESE: J1.3 Q3.2 R3.2
RESE': R2.2 R3.1 SJ1.2
RESET: C5.1 IC1.1 R_RESET.1 RESET_BUTTON.3 RESET_BUTTON.4 U2.3
RTC_RST: U2.16 U3.4
RX: TP2.TP U2.24
SCK: D10.2 J1.13 J4.P5 R6.1 TP8.TP U1.6 U2.6
SCL: J3.1 R2_PINH.1 SENSOR2.4 U2.20 U3.16 U4.7
SDA: J3.2 R1_PINH.1 SENSOR2.3 U2.19 U3.15 U4.8
SRC: C4.2 D5.2 L1.1 Q3.3
SS_SD: D8.2 J4.P2 R10.1 U2.4
TX: TP1.TP U2.25
USB_D+: D1.4 U2.14
USB_D-: D1.6 U2.13
VBAT [POWER]: C2_BAT.1 MCP73831.3 Q1.3 TP3.TP U4.2 U4.3
VBUS [POWER]: C1_BAT.1 C4_USB1.1 C4_USB.1 CHG_LED.A D1.2 D2.2 MCP73831.4 PFMF.050.1.2 Q1.1 R1_PWRUSB1.2 TP14.TP
VRTC [POWER]: C8.1 C10_SUPERCAP.2 R_CAPACITOR.2 U3.14
VUSB [POWER]: J2.A4 J2.A9 J2.B4 J2.B9 PFMF.050.1.1

## Tracks (layer width: path | path; a pad name or v marks a point on that pad's centre or on a via)
3V3
  Top 0.3: J4.P4 5.75,90.51 6.65,90.51 7.62,91.48 7.62,98.75 6.79,99.58 6.79,100 C9.1 6.72,100.14 6.99,100.14 8.24,101.38 R10.2 8.38,101.38 8.93,101.38 14.96,107.41 20.15,107.41 R_BOOT.2 20.29,107.34 20.84,107.34 21.61,106.58 28.74,106.58 30.89,108.72 45.08,108.72 R_RESET.2 45.22,108.72 45.84,108.72 46.19,108.38 46.19,103.18 47.16,102.21 47.78,102.21 IC1.2 47.92,102.14 48.41,102.14 48.68,102.42 48.68,102.56 50,103.88 50.69,103.88 54.29,107.48 60.18,107.48 R_CHANGE.2 60.04,107.34 60.04,104.84 87.12,77.77 87.12,77.28 TP16.TP 87.25,77.14 87.25,76.31 89.61,73.96 89.61,64.06 D7.2 89.75,63.99 89.68,63.92 89.68,63.36 89.58,63.26 | J3.3 164.4,19.8 149.86,19.8 130.33,39.33 129.64,39.33 C1_BAT2.1 129.57,39.47 128.39,39.47 126.8,37.88 125.9,37.88 TANT.+ 125.76,37.53 125.76,37.81 124.65,38.92 124.3,38.92 122.36,40.86 122.36,41.2 IC4.5 122.16,41.27 120.98,41.27 120.29,41.97 118.76,41.97 117.17,40.37 116.34,40.37 115.99,40.03 115.99,39.54 115.72,39.27 114.47,39.27 93.9,59.83 93.9,61.56 93.63,61.84 93.14,61.84 R2_PINH1.2 92.93,61.84 91.13,61.84 89.89,63.09 89.75,63.09 89.58,63.26 | 89.58,63.26 89.4,63.09 89.4,62.26 R1_PINH1.2 89.26,62.12 89.26,61.63 88.5,60.87 88.5,60.18 U3.2 88.5,60.04 88.5,58.93 81.85,52.28 80.4,52.28 70.91,42.8 70.91,31.23 70.84,31.09 | U2.2 9.07,46.05 9.14,45.98 9.14,45.15 12.53,41.76 19.18,41.76 R1.2 19.32,41.76 31.92,41.76 | R_CL1.2 84.62,24.03 84.62,24.65 84.42,24.86 81.72,24.86 Q2.3 81.58,24.93 78.94,24.93 78.74,25.14 78.74,25.55 78.18,26.11 76.17,26.11 76,25.93 | 76,25.93 75.83,25.76 75.83,25.41 R7.2
  Top 0.3: U1.7 42.03,56.09 42.03,57.27 U1.8 41.9,57.27 40.72,57.27 40.03,57.96 36.22,57.96 35.11,56.85 35.11,55.54 34.42,54.85 34.42,54.78 34.35,54.78 U1.3 34.14,54.78 34.07,54.78 34,54.71 34,54.5 33.73,54.22 33.66,54.22 32.96,53.53 32.96,52.7 33.03,52.63 33.03,49.44 32.83,49.24 32.83,48.75 R8.2 32.69,48.75 32.2,48.75 31.92,48.48 31.92,41.76 | 31.92,41.76 31.92,40.86 43,29.78 43.56,29.78 R6.2 43.77,29.78 46.67,29.78 R5.2 46.81,29.78 48.54,29.78 R9.2 48.68,29.78 49.65,29.78 50.97,31.09 70.84,31.09 | 70.84,31.09 76,25.93
32KHZ  (via drill 0.3)
  Top 0.15: R2_PINH1.1 92.93,60.59 90.37,60.59 89.96,60.18 89.75,60.18 U3.1 89.75,60.11 89.75,59 82.75,52.01 82.75,48.54 82.06,47.85 81.78,47.85 v80.81,48.82 | v30.61,56.3 27.42,56.3 17.94,46.81 17.94,46.12 U2.9 | v40.16,56.3 40.16,54.15 43.84,50.48 v45.08,50.48
  Bottom 0.15: v40.16,56.3 v30.61,56.3 | v45.08,50.48 79.15,50.48 v80.81,48.82
DN  (via drill 0.3)
  Top 0.15: J2.A7 163.57,54.5 162.88,54.5 162.81,54.43 162.81,53.74 163.01,53.53 163.57,53.53 J2.B7 163.64,53.53 164.47,53.53 164.54,53.6 v164.68,53.6 | v150.48,50.69 148.96,50.69 D1.1
  Bottom 0.15: v150.48,50.69 152.35,50.69 155.26,53.6 v164.68,53.6
DP  (via drill 0.3)
  Top 0.15: 164.54,54.22 164.54,54.85 164.4,54.98 163.64,54.98 J2.B6 | 164.54,54.22 164.54,54.08 164.47,54.02 163.64,54.02 J2.A6 | v149.58,47.64 148.96,48.27 148.96,48.75 D1.3 | v164.68,54.22 164.54,54.22
  Bottom 0.15: v149.58,47.64 159.83,47.64 165.16,52.98 165.16,53.74 v164.68,54.22
EPD_3V3
  Top 0.3: 92.21,20.67 91.89,20.98 91.89,22.23 86.84,27.29 86.84,28.46 L1.2 | 92.21,20.67 92.31,20.57 92.86,20.57 EFD_C5.1 | J1.15 86.15,15.1 85.66,15.1 J1.16 85.66,15.23 85.66,15.44 85.73,15.51 85.73,15.65 85.66,15.72 85.66,15.79 | 79.43,22.99 79.43,23.68 79.57,23.82 Q2.2 | 79.43,22.99 79.43,19.11 | 79.43,19.11 79.43,18.97 77.91,17.45 76.87,17.45 75.76,16.34 75.76,15.72 C7.1 | 85.66,15.79 82.34,19.11 79.43,19.11 | 79.43,22.99 79.01,22.99 78.74,23.27 74.86,23.27 68.56,29.57 68.42,29.57 TP17.TP | 92.21,20.67 91.89,20.36 91.89,19.94 88.22,16.27 86.22,16.27 85.8,15.86 85.66,15.79
EPD_3V3_C  (via drill 0.3)
  Top 0.3: 81.23,25.76 79.64,25.76 Q2.1 | 81.23,25.76 81.51,25.48 82.06,25.48 82.13,25.55 82.41,25.55 82.61,25.35 84.69,25.35 85.45,24.58 85.45,23.41 85.18,23.13 83.65,23.13 83.38,23.41 83.38,23.96 R_CL1.1 | 77.97,75.55 31.58,75.55 20.5,64.47 20.5,63.64 U2.18 | 77.97,75.55 79.57,77.14 79.98,77.14 TP13.TP | v81.37,71.53 81.37,72.09 78.05,75.41 77.97,75.55 | v81.37,25.76 81.23,25.76
  Bottom 0.3: v81.37,71.53 v81.37,25.76
EPD_BUSY  (via drill 0.3)
  Top 0.15: v92.45,19.8 89.12,16.48 89.12,15.1 J1.9 | v80.81,49.44 v81.92,48.34 | v65.37,76.24 64.4,77.21 TP9.TP 64.33,77.21 63.78,77.21 62.53,78.46 19.04,78.46 9.9,69.32 9.9,68.28 10.25,67.93 10.25,63.64 U2.26
  Bottom 0.15: v92.45,19.8 92.45,24.79 94.18,26.52 94.18,36.08 v81.92,48.34 | v80.81,49.44 80.81,60.8 v65.37,76.24
EPD_CS  (via drill 0.3)
  Top 0.15: 49.34,28.22 49.24,28.32 48.68,28.32 48.61,28.39 R9.1 | 49.34,28.22 67.52,10.04 73.61,10.04 74.1,10.53 83.79,10.53 87.67,14.4 87.67,15.03 J1.12 | v49.44,30.33 49.44,32.69 48.89,33.24 48.54,33.24 D6.2 | 49.34,28.22 v49.44,28.32 | v30.47,42.31 23.55,42.31 20.5,45.36 20.5,46.05 U2.11 | v65.79,77.21 68.35,77.21 TP10.TP
  Bottom 0.15: v49.44,30.33 v49.44,28.32 49.38,28.39 44.39,28.39 31.2,41.59 | 31.2,41.59 v30.47,42.31 | v65.79,77.21 59.69,77.21 55.12,72.64 55.12,68.63 42.52,56.02 42.52,52.91 31.2,41.59
EPD_DC  (via drill 0.3)
  Top 0.15: v97.71,55.26 97.71,14.61 94.6,11.49 91.06,11.49 88.16,14.4 88.16,15.03 J1.11 | v74.44,76.73 73.2,76.73 72.78,77.14 72.02,77.14 TP11.TP | v17.31,54.91 17.31,53.39 12.81,48.89 12.81,46.12 U2.5
  Bottom 0.15: v97.71,55.26 97.71,56.23 77.21,76.73 v74.44,76.73 74.37,76.73 73.13,77.97 40.37,77.97 v17.31,54.91
EPD_RST  (via drill 0.3)
  Top 0.15: v92.17,60.11 97.44,54.85 97.44,14.75 94.46,11.77 91.27,11.77 88.64,14.4 88.64,15.03 J1.10 | v76.8,76.11 75.83,77.08 TP12.TP | v50.34,76.11 28.46,76.11 16.69,64.33 16.69,63.64 U2.21
  Bottom 0.15: v92.17,60.11 92.17,61.35 77.42,76.11 v76.8,76.11 74.44,76.11 72.85,77.7 51.94,77.7 v50.34,76.11
FLASH_CS  (via drill 0.3)
  Top 0.15: v45.91,29.22 45.91,28.74 46.19,28.46 46.67,28.46 R5.1 | v45.84,32.76 46.33,33.24 46.67,33.24 D9.2 46.54,33.31 46.54,34.83 v34.97,46.4 | 28.15,53.22 21.74,46.81 21.74,46.12 U2.12 | 28.15,53.22 32.27,57.34 34.14,57.34 U1.1 | 28.15,53.22 v28.88,52.49
  Bottom 0.15: v45.91,29.22 45.91,32.69 v45.84,32.76 | v28.88,52.49 v34.97,46.4
GDR  (via drill 0.3)
  Top 0.15: v92.59,15.86 92.66,15.79 92.66,15.1 J1.2 | R4.2 77.28,19.53 76.66,18.91 v76.59,18.91 76.52,18.91 76.45,18.97 75.34,18.97 74.51,18.14 74.51,15.72 73.75,14.96 72.99,14.96 72.71,15.23 72.71,15.3 72.23,15.79 72.09,15.79 Q3.1
  Bottom 0.15: v92.59,15.86 92.24,15.86 91.48,15.1 80.4,15.1 v76.59,18.91
GND  (via drill 0.3)
  Top 0.15: 44.53,31.79 46.67,31.79 D9.1 46.74,31.79 48.48,31.79 D6.1 48.54,31.72 48.54,31.3 v48.96,30.89 | 44.53,31.79 43.77,31.79 D10.1 | 35.32,53.53 36.08,53.53 37.95,55.4 U1.9 | 35.32,53.53 34.21,53.53 U1.4 34.14,53.46 34.14,53.25 33.79,52.91 v33.52,52.91 | 35.32,53.53 35.32,47.78 34.9,47.37 34.56,47.37 D12.1 34.49,47.3 34.49,46.26 44.53,36.22 44.53,31.79 | C10.2 67.66,107.48 66.76,107.48 66.34,107.89 65.79,107.89 CHANGE_BUTTON.2 65.72,107.89 CHANGE_BUTTON.1 62.19,107.89 61.08,107.89 60.8,108.17 59.62,108.17 59.35,107.89 53.81,107.89 53.32,107.41 52.91,107.41 C5.2 52.84,107.48 51.94,107.48 | 51.66,101.94 52.35,101.94 52.49,101.8 C_DELAY.2 | 51.66,101.94 50.07,101.94 49.38,101.24 47.85,101.24 IC1.3 | 51.94,107.48 51.8,107.48 51.38,107.89 50.9,107.89 RESET_BUTTON.2 50.76,107.89 47.37,107.89 RESET_BUTTON.1 47.3,107.96 46.74,108.52 46.67,108.52 45.98,109.21 45.98,109.28 45.77,109.48 30.75,109.48 28.74,107.48 28.05,107.48 C6.2 28.05,107.41 26.73,107.41 26.32,107.82 25.76,107.82 BOOT_BUTTON.2 25.69,107.89 22.3,107.89 BOOT_BUTTON.1 22.23,107.89 21.61,107.89 20.98,108.52 20.98,109.21 20.84,109.35 15.03,109.35 7.48,101.8 7.48,101.66 7.13,101.31 6.72,101.31 C9.2 6.65,101.31 6.16,101.31 3.67,98.82 3.67,96.4 3.05,95.77 3.05,95.56 J4.G4 3.12,95.56 3.81,94.87 3.81,93.76 4.67,92.9 | v51.66,102 51.66,101.94 | v51.94,107.34 51.94,107.48 | U2.29_2 12.26,53.39 13.43,53.39 U2.29_5 | U2.29_8 14.75,53.32 14.75,52.15 U2.29_7 14.68,52.15 13.5,52.15 U2.29_4 13.43,52.15 12.26,52.15 U2.29_1 12.26,52.08 12.26,51.73 7.76,47.23 7.76,46.12 U2.1 | U2.29_5 13.5,53.39 14.68,53.39 U2.29_8
  Top 0.15: U2.29_6 13.43,54.64 12.26,54.64 U2.29_3 12.26,54.71 12.26,54.91 7.76,59.42 7.76,63.57 U2.28 7.76,63.64 7.76,76.52 2.08,82.2 2.08,82.34 J4.G3 2.08,82.41 2.08,86.49 | U2.29_9 14.68,54.64 13.5,54.64 U2.29_6 | U2.29_5 13.23,53.46 13.23,54.57 U2.29_6 | 14.23,93.87 16.27,91.83 16.27,91.13 J4.G2 16.34,91.06 16.34,90.37 17.24,89.47 17.24,87.19 16.34,86.28 16.34,85.45 J4.G1 | 14.23,93.87 12.88,95.22 12.88,99.1 D8.1 | 4.67,92.9 4.85,92.73 5.68,92.73 J4.P6 | 2.08,86.49 2.08,90.3 4.67,92.9 | 14.23,93.87 6.86,86.49 2.08,86.49 | v15.51,52.98 15.3,53.18 14.82,53.18 U2.29_8 | J1.17 85.18,15.03 85.18,14.34 83.58,12.74 80.81,12.74 80.68,12.6 J1.MP2 80.61,12.6 80.4,12.6 77.35,15.65 77.08,15.65 C7.2 77.14,15.58 77.14,15.3 76.73,14.89 75.28,14.89 | 75.28,14.89 75.07,15.1 75.07,16.34 75.21,16.48 75.34,16.48 77.08,18.21 77.28,18.21 R4.1 77.35,18.28 77.84,18.28 78.11,18.56 78.11,20.36 76.87,21.61 76.87,21.95 D11.1 76.8,22.02 76.38,22.02 v75.97,22.44 | 75.28,14.89 75.28,12.53 73.89,11.15 73.47,11.15 R2.1 73.34,11.15 71.4,11.15 SJ1.1 71.61,11.22 71.61,13.3 EFD_C1.2 71.61,13.37 71.61,13.71 v71.19,14.13 | EFD_C6.2 89.26,21.74 EFD_C7.2 89.12,21.74 87.46,21.74 EPD_C8.2 EPD_C9.2 | 78.43,24.89 78.81,24.52 80.26,24.52 80.75,24.03 80.75,22.02 80.95,21.81 EPD_C12.2 81.02,21.74 82.48,21.74 EPD_C11.2 82.55,21.74 84.07,21.74 EPD_C10.2 84.14,21.74 85.73,21.74 EPD_C9.2 | 78.43,24.89 77.97,25.35 77.56,25.35 EFD_C2.2 | J1.MP1 94.11,12.6 93.97,12.74 91.27,12.74 89.68,14.34 89.68,15.03 J1.8 89.68,15.1 89.68,16 93.69,20.01 93.69,21.54 93.28,21.95 93,21.95 EFD_C5.2 92.93,21.88 92.93,25.69 92.1,26.52 92.1,28.46 91.2,29.36 91.2,29.57 D3.1 91.13,29.64 91.13,29.92 87.98,33.07
  Top 0.15: 87.98,33.07 85.94,35.11 U3.13 85.94,50.9 85.94,51.11 86.56,51.73 86.56,52.01 87.12,52.56 91,52.56 91.96,51.59 92.38,51.59 C8.2 92.45,51.66 93.69,51.66 94.6,52.56 94.94,52.56 C10_SUPERCAP.1 94.94,52.49 94.94,52.15 v95.56,51.52 | 87.98,33.07 87.32,32.41 86.01,32.41 84.9,31.3 84.9,25.69 86.08,24.52 86.08,21.81 EPD_C9.2 | 78.43,24.89 v78.32,24.79 | 118.07,39.4 118.07,37.26 C1_BAT1.2 | 118.07,39.4 118.9,40.23 119.46,40.23 IC4.2 | C2_BAT.2 127.7,51.59 126.45,51.59 125.9,52.15 116.27,52.15 115.65,51.52 115.65,51.04 115.58,50.97 C1_BAT.2 115.51,50.9 115.44,50.83 115.44,50.28 114.26,49.1 114.26,40.37 114.54,40.1 115.09,40.1 R1_PWRUSB1.1 115.16,40.1 115.51,40.1 v116.34,40.93 | v118,39.4 118.07,39.4 | U4.4 132.13,50.07 132.41,50.07 132.47,50.14 132.54,50.14 133.17,50.76 U4.9 | U4.9 133.24,50.76 133.44,50.55 134.07,50.55 U4.6 134.14,50.55 134.48,50.55 134.55,50.62 136.15,49.03 | U4.1 132.13,51.52 132.41,51.52 132.47,51.45 132.54,51.45 133.17,50.83 U4.9 | 136.15,49.03 145.84,49.03 R2-USB.2 145.91,49.03 v147.99,49.03 | MCP73831.2 125,50 124.23,50 124.03,49.79 124.03,49.31 122.43,47.71 122.43,46.88 R2_BAT.1 122.5,46.88 122.85,46.88 124.86,44.87 124.86,42.17 | 124.86,42.17 126.17,40.86 TANT.- 125.83,40.51 126.1,40.79 129.57,40.79 C1_BAT2.2 129.43,40.86 136.15,47.58 136.15,49.03 | v124.72,42.1 124.79,42.17 124.86,42.17 | C1.2 153.6,6.37 153.6,8.59 154.43,9.42 154.43,9.56 SENSOR2.5 154.5,9.63 155.12,9.63 155.22,9.52 | 155.22,9.52 157.68,7.06 157.68,6.37 C2.2 | 155.33,11.01 155.19,11.15 154.5,11.15 SENSOR2.7 | 155.33,11.01 155.33,9.63 155.22,9.52
  Top 0.15: 155.33,11.01 155.4,11.01 156.37,11.98 157.34,11.98 SENSOR2.1 157.41,12.05 160.18,12.05 165.44,17.31 165.44,20.57 165.23,20.77 164.47,20.77 J3.4 164.47,20.84 164.47,49.1 J2.MP3 | J2.B12 163.64,50.97 163.64,50.76 J2.A1 163.64,50.69 163.64,49.65 164.12,49.17 J2.MP3 | J2.MP3 164.19,49.17 168.07,49.17 J2.MP1 167.31,49.24 167.31,59.35 J2.MP2 168.07,59.42 164.19,59.42 J2.MP4 164.12,59.35 163.64,58.86 163.64,57.82 J2.A12 163.64,57.76 163.64,57.55 J2.B1 163.57,57.55 160.45,57.55 154.5,51.59 153.46,51.59 153.25,51.38 R2-USB1.1 | TP4.TP 146.39,63.85 146.39,60.45 TP5.TP 146.39,60.39 146.39,58.86 152.35,52.91 152.35,51.73 152.56,51.52 153.04,51.52 153.11,51.45 R2-USB1.1 | C4_USB1.2 151.59,45.77 151.59,47.02 C4_USB.2 151.66,47.09 151.66,47.58 152.42,48.34 152.42,49.79 152.31,49.9 | 152.31,49.9 152.21,49.79 151.45,49.79 D1.5 151.38,49.79 v150.48,49.79 | 152.31,49.9 153.18,50.76 153.18,51.38 R2-USB1.1
  Bottom 0.15: v51.66,102 51.66,107.06 v51.94,107.34 | v33.52,52.91 29.09,52.91 29.02,52.98 v15.51,52.98 | v78.32,24.79 v75.97,22.44 | v124.72,42.1 122.02,39.4 v118,39.4 117.86,39.4 v116.34,40.93 115.86,40.93 104.22,52.56 96.81,52.56 95.77,51.52 v95.56,51.52 | v147.99,49.03 149.72,49.03 v150.48,49.79 | v48.96,30.89 54.43,30.89 v71.19,14.13
GND_TOP
  pour Top: 78.06,10.16 78.09,10.18 96.61,10.18 96.64,10.16 96.66,10.14 96.67,10.11 96.67,0.17 169.93,0.17 169.93,66.92 92.09,66.92 92.06,66.94 92.04,66.96 92.03,66.99 92.03,111.03 70.17,111.03 70.17,110.09 70.16,110.06 70.14,110.04 70.11,110.03 19.19,110.03 19.16,110.04 19.14,110.06 19.12,110.09 19.12,111.03 0.17,111.03 0.17,0.17 78.03,0.17 78.03,10.11 78.04,10.14
  pour Bottom: 78.06,10.16 78.09,10.18 96.61,10.18 96.64,10.16 96.66,10.14 96.67,10.11 96.67,0.17 169.93,0.17 169.93,66.92 92.09,66.92 92.06,66.94 92.04,66.96 92.03,66.99 92.03,111.03 70.17,111.03 70.17,110.09 70.16,110.06 70.14,110.04 70.11,110.03 19.19,110.03 19.16,110.04 19.14,110.06 19.12,110.09 19.12,111.03 0.17,111.03 0.17,0.17 78.03,0.17 78.03,10.11 78.04,10.14
GPIO8
  Top 0.15: R1.1 19.18,43.07 19.18,46.05 U2.10
I2C_PW  (via drill 0.3)
  Top 0.15: SENSOR2.2 157.41,11.15 158.1,11.15 158.51,10.73 158.51,5.4 158.1,4.99 157.75,4.99 C2.1 157.68,5.05 157.06,5.68 156.99,5.68 156.37,6.3 R2_PINH.2 156.3,6.37 155.05,6.37 R1_PINH.2 154.98,6.3 154.36,5.68 154.29,5.68 153.67,5.05 C1.1 153.53,5.05 153.11,5.05 152.77,5.4 152.77,9.49 153.67,10.39 153.67,10.46 | 153.67,10.46 154.43,10.46 SENSOR2.6 | 153.67,10.46 153.6,10.53 153.6,11.84 | 153.6,11.84 153.8,12.05 154.43,12.05 SENSOR2.8 | v86.98,64.68 84.14,67.52 24.1,67.52 21.74,65.16 21.74,63.64 U2.17 | v99.03,53.6 140.78,11.84 153.6,11.84
  Bottom 0.15: v86.98,64.68 98.06,53.6 v99.03,53.6
INT_RTC  (via drill 0.3)
  Top 0.15: v35.46,57.96 27.84,57.96 16.69,46.81 16.69,46.12 U2.8 | v42.8,58.93 80.33,58.93 80.47,58.79 86.36,58.79 87.19,59.62 87.19,60.11 U3.3 87.25,60.18 87.25,61.7 87.74,62.19 88.02,62.19 R1_PINH1.1 88.09,62.26 88.16,62.33 88.16,62.81 88.43,63.09 88.43,64.54 83.72,69.25 83.72,77.14 TP15.TP
  Bottom 0.15: v35.46,57.96 41.83,57.96 v42.8,58.93
IO/BOOT  (via drill 0.3)
  Top 0.15: C6.1 28.05,108.65 27.01,108.65 26.32,109.35 BOOT_BUTTON.3 25.69,109.35 22.3,109.35 BOOT_BUTTON.4 22.23,109.42 22.02,109.62 v21.19,109.62 | v19.39,108.65 20.15,108.65 R_BOOT.1 | v24.24,67.03 24.24,63.64 U2.15 | v24.24,82.41 24.24,104.57 v22.78,106.02
  Bottom 0.15: 20.22,108.65 v19.39,108.65 | v21.19,109.62 20.22,108.65 | v24.24,82.41 v24.24,67.03 | v22.78,106.02 20.22,108.58 20.22,108.65
IO/CHANGE  (via drill 0.3)
  Top 0.15: C10.1 67.66,108.79 66.89,108.79 66.34,109.35 65.79,109.35 CHANGE_BUTTON.3 65.72,109.42 62.33,109.42 CHANGE_BUTTON.4 62.19,109.35 61.63,109.35 61.08,108.79 60.25,108.79 R_CHANGE.1 60.18,108.79 59.76,108.79 59.49,108.52 v59.35,108.52 | v28.81,77.97 27.77,77.97 14.13,64.33 14.13,63.64 U2.23
  Bottom 0.15: v59.35,108.52 v28.81,77.97
MISO  (via drill 0.3)
  Top 0.15: R8.1 32.83,47.51 34.14,48.82 34.49,48.82 D12.2 34.21,48.89 v34.21,49.72 | v34.21,55.4 U1.2 | v18.42,55.4 16.48,55.4 9.07,62.81 9.07,63.57 U2.27 9,63.64 8.73,63.92 v8.73,66.13 | v7.06,91.69 7.06,93.42 6.72,93.76 5.96,93.76 J4.P7 | v50.97,76.11 51.04,76.04 51.94,76.94 TP6.TP
  Bottom 0.15: v34.21,49.72 v34.21,55.4 | v34.21,55.4 v18.42,55.4 | v7.06,91.69 7.06,67.8 v8.73,66.13 | v50.97,76.11 50.97,66.48 39.89,55.4 v34.21,55.4
MOSI  (via drill 0.3)
  Top 0.15: v88.57,15.86 86.84,15.86 86.63,15.65 86.63,15.1 J1.14 | v78.88,21.12 78.39,21.61 78.39,21.95 D11.2 | v74.93,23.96 75.07,24.1 75.76,24.1 R7.1 | v42.03,54.15 42.03,53.53 U1.5 42.1,53.53 42.66,53.53 v46.19,50 | v54.85,76.11 54.98,76.11 55.88,77.01 TP7.TP | v18.7,44.94 15.79,44.94 15.37,45.36 15.37,46.05 U2.7 | v4.16,86.98 4.16,87.46 5.19,88.5 5.19,88.99 5.54,89.33 5.89,89.33 J4.P3
  Bottom 0.15: v88.57,15.86 84.9,15.86 84.69,15.65 84.35,15.65 v78.88,21.12 76.38,21.12 74.93,22.58 v74.93,23.96 72.23,23.96 v46.19,50 | v54.85,76.11 54.85,69.94 42.03,57.13 v42.03,54.15 42.03,52.84 35.11,45.91 25,45.91 24.03,44.94 v18.7,44.94 16,44.94 11.08,49.86 11.08,59.9 4.16,66.83 v4.16,86.98
N$1  (via drill 0.3)
  Top 0.15: v147.36,50.34 145.91,50.34 R2-USB.1 | v164.54,55.88 164.4,56.02 163.64,56.02 J2.B5
  Bottom 0.15: v147.36,50.34 149.51,50.34 155.05,55.88 v164.54,55.88
N$2  (via drill 0.3)
  Top 0.15: C1_BAT1.1 116.75,37.26 116.75,39.33 116.96,39.54 D2.1 117.03,39.61 117.52,39.61 118.69,40.79 118.69,41 118.9,41.2 119.46,41.2 IC4.1 119.53,41.2 120.08,41.2 120.29,41 | 120.29,41 120.29,39.61 120.08,39.4 119.53,39.4 IC4.3 | v125.34,44.87 130.4,44.87 131.23,45.7 131.23,46.19 Q1.2 | v120.43,41.06 120.36,41 120.29,41
  Bottom 0.15: v125.34,44.87 124.23,44.87 v120.43,41.06
N$3  (via drill 0.3)
  Top 0.15: v121.39,49.1 120.5,49.1 R1_BAT.2 | v124.03,48.68 124.03,48.82 124.23,49.03 125,49.03 MCP73831.1
  Bottom 0.15: v121.39,49.1 123.61,49.1 v124.03,48.68
N$4
  Top 0.15: CHG_LED.C 120.5,50.9 120.5,50.48 119.87,49.86 119.46,49.86 119.25,49.65 119.25,49.17 119.18,49.1 R1_BAT.1
N$5
  Top 0.15: R2_BAT.2 122.36,45.57 121.88,45.57 121.6,45.84 121.6,48.2 122.43,49.03 MCP73831.5
N$6
  Top 0.15: IC1.5 50.62,103.18 52.42,103.18 52.49,103.11 C_DELAY.1
N$10  (via drill 0.3)
  Top 0.15: C4.1 96.53,29.29 95.5,29.29 95.22,29.57 94.67,29.57 D3.2 94.6,29.64 94.11,29.64 v93.69,29.22 | v91.62,27.15 91.2,26.73 91.2,26.11 D4.1
  Bottom 0.15: v93.69,29.22 v91.62,27.15
N$11  (via drill 0.3)
  Top 0.15: v154.98,52.7 R2-USB1.2 | v164.54,52.98 163.64,52.98 J2.A5
  Bottom 0.15: v154.98,52.7 164.26,52.7 v164.54,52.98
N$13  (via drill 0.3)
  Top 0.15: v90.92,60.11 96.05,54.98 96.05,49.58 94.67,48.2 88.71,48.2 R_CAPACITOR.1 | v87.88,63.16 87.88,63.78 87.67,63.99 D7.1
  Bottom 0.15: v87.88,63.16 v90.92,60.11
N$14  (via drill 0.3)
  Top 0.15: v90.58,16.27 91.13,15.72 91.13,15.1 J1.5 | v86.49,18.56 84,18.56 v83.79,18.77 | v78.32,23.82 78.11,24.03 77.56,24.03 EFD_C2.1
  Bottom 0.15: v90.58,16.27 88.78,16.27 v86.49,18.56 | v83.79,18.77 83.79,19.25 84.14,19.6 84.14,19.88 80.19,23.82 v78.32,23.82
N$15  (via drill 0.3)
  Top 0.15: v90.92,13.71 91.69,14.47 91.69,15.03 J1.4 | v70.57,14.13 70.36,13.92 70.36,13.43 70.29,13.37 EFD_C1.1
  Bottom 0.15: v90.92,13.71 71.4,13.71 71.33,13.64 71.05,13.64 v70.57,14.13
N$17  (via drill 0.3)
  Top 0.15: v81.65,15.86 81.65,15.1 J1.24 | v82.61,18.07 v82.61,16.76 | v81.44,19.74 81.02,20.15 81.02,20.43 EPD_C12.1
  Bottom 0.15: v81.65,15.86 82.55,16.76 v82.61,16.76 | v82.61,18.07 82.61,19.88 82.27,20.22 81.92,20.22 v81.44,19.74
N$19  (via drill 0.3)
  Top 0.15: v83.1,17.59 83.1,16.62 82.68,16.2 82.68,15.1 J1.22 | v83.65,19.74 84.07,20.15 84.07,20.43 EPD_C10.1
  Bottom 0.15: v83.1,17.59 83.1,19.18 v83.65,19.74
N$21  (via drill 0.3)
  Top 0.15: v84,16.69 83.65,16.34 83.65,15.1 J1.20 | v87.05,19.74 87.46,20.15 87.46,20.43 EPD_C8.1
  Bottom 0.15: v87.05,19.74 v84,16.69
N$22  (via drill 0.3)
  Top 0.15: v84.48,14.27 84.28,14.27 84.14,14.4 84.14,15.03 J1.19 | v89.61,19.74 89.19,20.15 89.19,20.43 EFD_C7.1
  Bottom 0.15: v84.48,14.27 91.62,14.27 93.07,15.72 93.07,16.27 v89.61,19.74
N$23  (via drill 0.3)
  Top 0.15: v84.55,16.14 84.62,16.07 84.62,15.1 J1.18 | v87.6,16.83 91,20.22 91,20.43 EFD_C6.1
  Bottom 0.15: v84.55,16.14 86.91,16.14 v87.6,16.83
PREVGH  (via drill 0.3)
  Top 0.15: v83.58,17.11 83.52,17.04 83.52,16.62 83.17,16.27 83.17,15.1 J1.21 | v85.39,19.74 85.8,20.15 85.8,20.43 EPD_C9.1 | v82.89,31.58 82.89,33.17 D5.1
  Bottom 0.15: v83.58,17.11 83.58,17.94 v85.39,19.74 85.39,19.8 82.89,22.3 v82.89,31.58
PREVGL  (via drill 0.3)
  Top 0.15: v82.13,18.56 82.13,15.1 J1.23 | 82.51,20.12 82.55,20.15 82.55,20.43 EPD_C11.1 | 82.51,20.12 v82.13,19.74 | v93.14,26.11 94.6,26.11 D4.2 | v86.01,19.74 85.52,19.25 83.38,19.25 82.51,20.12
  Bottom 0.15: v82.13,19.74 v82.13,18.56 | v93.14,26.11 92.38,26.11 v86.01,19.74
RESE  (via drill 0.3)
  Top 0.15: v91.62,15.86 91.96,15.86 92.17,15.65 92.17,15.1 J1.3 | v76.31,20.29 75.9,19.88 75.9,19.6 R3.2 75.83,19.6 75.48,19.6 73.34,17.45 73.34,15.86 Q3.2
  Bottom 0.15: v91.62,15.86 90.79,15.86 90.3,15.37 81.23,15.37 v76.31,20.29
RESE'
  Top 0.15: 73.41,14.2 73.41,12.46 R2.2 | 73.41,14.2 74.79,15.58 74.79,16.83 75.9,17.94 75.9,18.21 R3.1 | SJ1.2 69.87,11.22 69.87,12.4 69.53,12.74 69.53,13.85 70.29,14.61 72.92,14.61 73.34,14.2 73.41,14.2
RESET  (via drill 0.3)
  Top 0.15: C5.1 52.84,108.79 52.01,108.79 51.45,109.35 50.9,109.35 RESET_BUTTON.3 50.76,109.42 48.41,109.42 | 48.41,109.42 47.37,109.42 RESET_BUTTON.4 | v46.74,105.61 47.78,104.57 47.78,103.18 IC1.1 | v45.64,106.71 45.22,107.13 45.22,107.41 R_RESET.1 | v12.46,51.31 12.26,51.31 10.25,49.31 10.25,46.12 U2.3 | v48.41,109.35 48.41,109.42
  Bottom 0.15: 45.7,106.64 v46.74,105.61 46.74,105.54 12.46,71.26 v12.46,51.31 | 45.7,106.64 v48.41,109.35 | 45.7,106.64 v45.64,106.71
RTC_RST
  Top 0.15: U2.16 22.99,63.57 22.99,62.88 24.31,61.56 85.04,61.56 85.87,60.73 85.87,60.18 U3.4
RX
  Top 0.15: U2.24 12.81,63.64 12.81,65.44 15.03,67.66 15.03,68.35 15.37,68.7 TP2.TP
SCK  (via drill 0.3)
  Top 0.15: v84.21,12.74 85.45,12.74 87.19,14.47 87.19,15.03 J1.13 | 44.42,28.22 44.32,28.32 43.84,28.32 43.77,28.39 R6.1 | 44.42,28.22 v59.9,12.74 | v42.87,30.68 42.87,32.83 43.28,33.24 D10.2 | v44.53,28.88 44.53,28.32 44.42,28.22 | 42.8,57.69 42.8,55.68 42.59,55.47 42.52,55.47 42.03,54.98 42.03,54.78 U1.6 | 42.8,57.69 42.59,57.89 40.65,57.89 40.1,58.45 25.76,58.45 20.88,53.56 | 20.88,53.56 14.13,46.81 14.13,46.12 U2.6 | v4.57,88.5 4.57,91.06 5.05,91.55 5.89,91.55 J4.P5 | 20.88,53.56 v11.98,62.46 | v59.21,76.11 60.18,77.08 TP8.TP | 42.8,57.69 v44.8,57.69
  Bottom 0.15: v59.9,12.74 v84.21,12.74 | v44.53,28.88 42.87,30.54 v42.87,30.68 42.87,55.68 44.8,57.62 v44.8,57.69 59.21,72.09 v59.21,76.11 | v4.57,88.5 4.57,88.02 6.79,85.8 6.79,67.45 11.77,62.46 v11.98,62.46
SCL  (via drill 0.3)
  Top 0.15: v155.67,5.68 155.74,5.68 156.02,5.4 156.02,5.33 156.3,5.05 R2_PINH.1 | v156.85,8.93 157.34,9.42 157.34,9.56 SENSOR2.4 | v134.83,50.97 134.76,51.04 134.14,51.04 U4.7 | v163.36,18.07 163.57,17.87 164.4,17.87 J3.1 163.98,17.8 163.98,17.31 v163.78,17.11 | v22.23,59.21 21.61,59.21 17.94,62.88 17.94,63.57 U2.20 | v41.9,59.21 42.66,58.45 79.84,58.45 v82.75,55.54 | v89.12,52.01 89.68,51.45 89.68,50.9 U3.16
  Bottom 0.15: v155.67,5.68 155.67,7.76 v156.85,8.93 156.85,10.18 v163.78,17.11 | 134.83,47.44 134.83,46.6 v163.36,18.07 | 134.83,47.44 v134.83,50.97 | v41.9,59.21 v22.23,59.21 | v82.75,55.54 82.75,54.29 85.45,51.59 88.71,51.59 v89.12,52.01 89.19,52.01 90.03,52.84 104.36,52.84 109.76,47.44 134.83,47.44
SDA  (via drill 0.3)
  Top 0.15: v154.98,4.29 154.98,4.99 R1_PINH.1 | v156.37,10.11 156.71,10.46 157.34,10.46 SENSOR2.3 | v135.31,50.48 135.31,51.11 134.83,51.59 134.14,51.59 U4.8 | v163.36,19.11 163.57,18.91 164.33,18.91 164.4,18.84 J3.2 | v83.24,54.43 79.5,58.17 42.52,58.17 41.97,58.72 23.34,58.72 19.18,62.88 19.18,63.57 U2.19 | v87.81,52.08 87.95,51.94 87.95,51.87 88.43,51.38 88.43,50.9 U3.15
  Bottom 0.15: v154.98,4.29 154.98,8.73 v156.37,10.11 156.37,10.46 163.84,17.94 163.84,18.56 163.36,19.04 v163.36,19.11 135.11,47.37 135.11,47.78 135.31,47.99 v135.31,50.48 135.31,51.11 134.97,51.45 133.38,51.45 129.64,47.71 109.9,47.71 104.5,53.12 88.92,53.12 87.88,52.08 v87.81,52.08 85.45,54.43 v83.24,54.43
SRC  (via drill 0.3)
  Top 0.15: v91.06,30.61 96.53,30.61 C4.2 | v87.32,33.03 86.49,33.03 86.36,33.17 D5.2 86.28,33.17 85.73,33.17 84.14,31.58 84.14,31.09 82.27,29.22 82.27,28.53 L1.1 82.2,28.46 81.85,28.12 v80.81,28.12 | v75.41,22.71 72.71,20.01 72.71,18 Q3.3
  Bottom 0.15: v91.06,30.61 89.75,30.61 v87.32,33.03 | v80.81,28.12 v75.41,22.71
SS_SD  (via drill 0.3)
  Top 0.15: D8.2 14.34,99.17 14.34,99.51 13.78,100.07 8.31,100.07 R10.1 8.31,100 8.31,89.54 7.2,88.43 6.37,88.43 6.3,88.36 J4.P2 6.23,88.29 6.09,88.16 5.26,88.16 4.78,87.67 v4.78,87.19 | v11.56,50 11.56,46.12 U2.4
  Bottom 0.15: v11.56,50 11.56,62.26 4.78,69.04 v4.78,87.19
TX
  Top 0.15: U2.25 11.56,63.64 11.56,67.31 11.22,67.66 11.29,67.73 11.29,68.77 TP1.TP
USB_D+  (via drill 0.3)
  Top 0.15: v150.83,48.13 150.9,48.13 151.38,48.61 151.38,48.75 D1.4 | v135.59,47.64 134.07,47.64 128.67,42.24 v125.48,42.24 | v25.07,45.36 24.31,46.12 U2.14
  Bottom 0.15: v150.83,48.13 136.08,48.13 v135.59,47.64 | v125.48,42.24 96.47,13.23 57.2,13.23 v25.07,45.36
USB_D-  (via drill 0.3)
  Top 0.15: v102.42,52.08 115.86,65.51 142.45,65.51 143.28,64.68 143.28,61.56 151.45,53.39 151.45,50.76 D1.6 | v81.92,53.12 49.93,53.12 46.33,49.51 v35.8,49.51 | v32.41,49.58 25.76,49.58 22.99,46.81 22.99,46.12 U2.13
  Bottom 0.15: v102.42,52.08 96.74,52.08 95.7,51.04 84,51.04 v81.92,53.12 | v35.8,49.51 34.62,49.51 34.35,49.24 32.76,49.24 v32.41,49.58
VBAT
  Top 0.3: U4.2 132.13,51.04 132.13,50.55 U4.3 131.99,50.55 131.78,50.55 131.71,50.62 131.57,50.62 131.06,50.1 | 131.06,50.1 130.33,49.38 130.33,48.34 Q1.3 130.19,48.2 130.19,45.57 129.91,45.29 128.81,45.29 128.53,45.57 128.53,48.27 125.83,50.97 125.07,50.97 MCP73831.3 | 131.06,50.1 129.43,51.73 | 129.43,51.73 128.32,52.84 127.77,52.84 C2_BAT.1 | 129.43,51.73 141.75,64.06 141.89,64.06 TP3.TP
VBUS  (via drill 0.3)
  Top 0.3: R1_PWRUSB1.2 115.16,41.34 115.99,41.34 116.13,41.48 116.83,41.48 116.96,41.62 D2.2 116.96,41.76 116.96,50.76 C1_BAT.1 116.89,50.9 CHG_LED.A 119.11,51.04 119.11,51.45 119.39,51.73 121.12,51.73 121.39,51.45 121.39,51.18 121.6,50.97 122.3,50.97 MCP73831.4 122.43,50.97 123.2,50.97 123.89,51.66 125.83,51.66 129.36,48.13 | 129.36,48.13 129.36,46.26 Q1.1 | PFMF.050.1.2 151.73,43 151.73,43.49 150.34,44.87 150.34,45.64 C4_USB1.1 150.27,45.77 150.27,47.02 C4_USB.1 150.27,47.16 150.27,49.24 149.79,49.72 148.96,49.72 D1.2 148.82,49.72 148.19,49.72 147.92,50 147.92,53.67 141.96,59.62 141.96,60.45 TP14.TP 141.82,59.97 141.2,59.97 v140.85,59.62 | v129.5,48.2 129.36,48.13
  Bottom 0.3: v129.5,48.2 129.5,48.27 v140.85,59.62
VRTC
  Top 0.3: C10_SUPERCAP.2 94.94,50.34 92.45,50.34 C8.1 92.31,50.34 91.13,50.34 90.16,49.38 87.39,49.38 | 87.39,49.38 87.39,48.27 R_CAPACITOR.2 | 87.39,49.38 87.19,49.58 87.19,50.83 U3.14
VUSB
  Top 0.3: J2.A4 163.64,51.73 163.64,52.01 J2.B9 163.5,51.87 162.81,51.87 | J2.B4 163.64,56.58 163.64,56.78 J2.A9 163.5,56.72 162.88,56.72 162.39,56.23 162.39,52.28 162.81,51.87 | 162.81,51.87 162.67,51.8 152.97,42.1 152.97,41 152.7,40.72 149.65,40.72 147.43,42.94 147.29,42.94 PFMF.050.1.1